# EAGLE board NanoDemultiplexerAndSDcardNew2 (EAGLE 9.6.2)
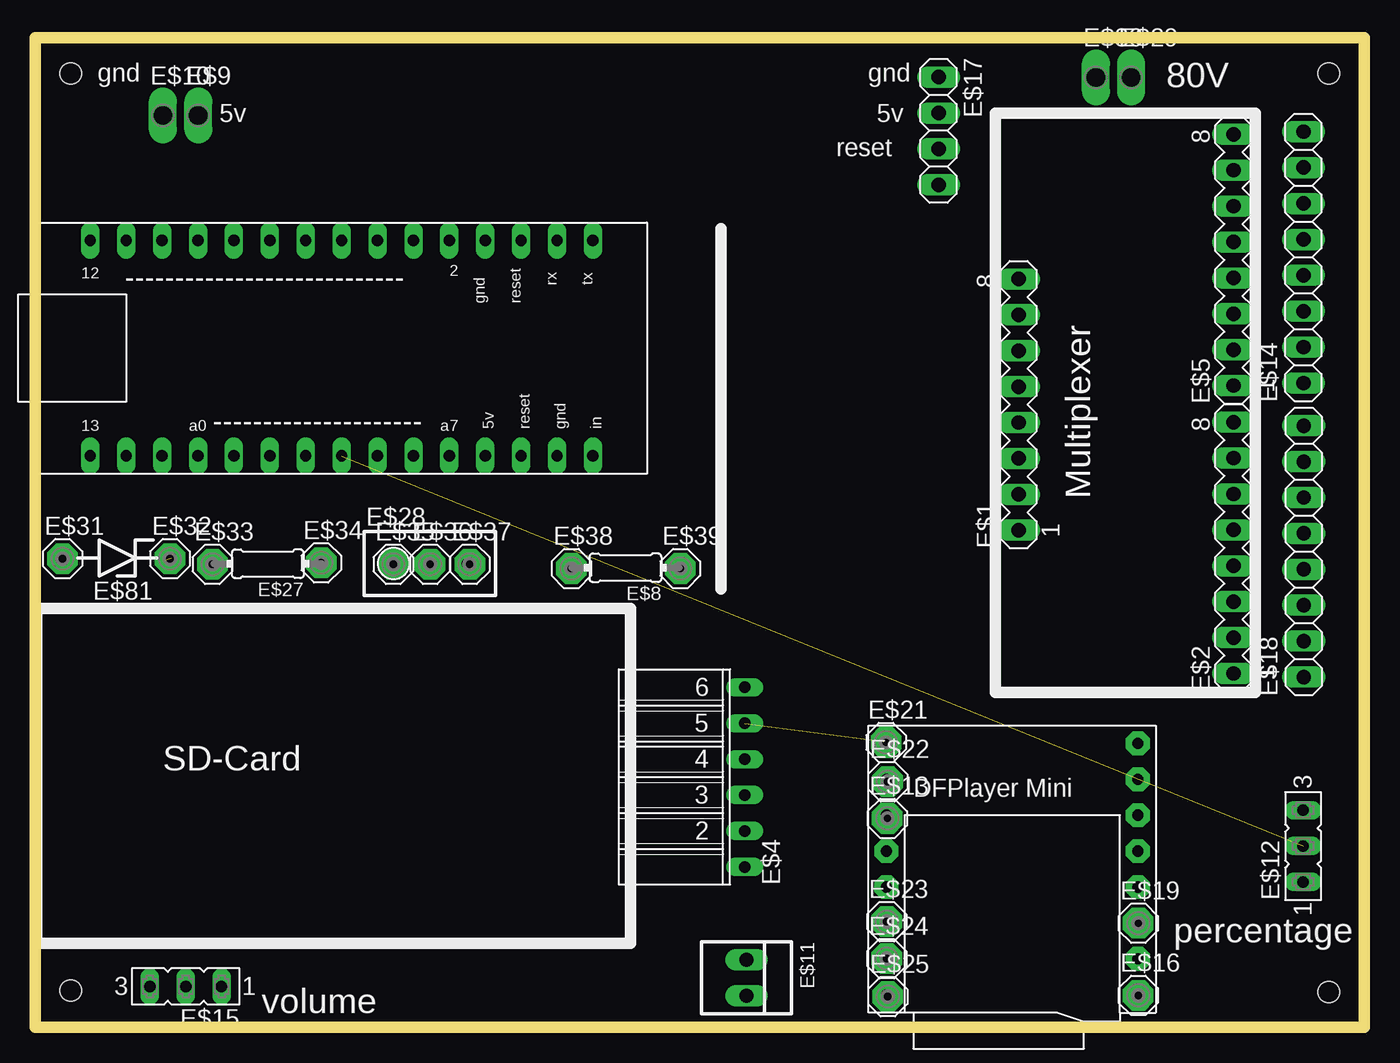
[diagram p0: board, top side]
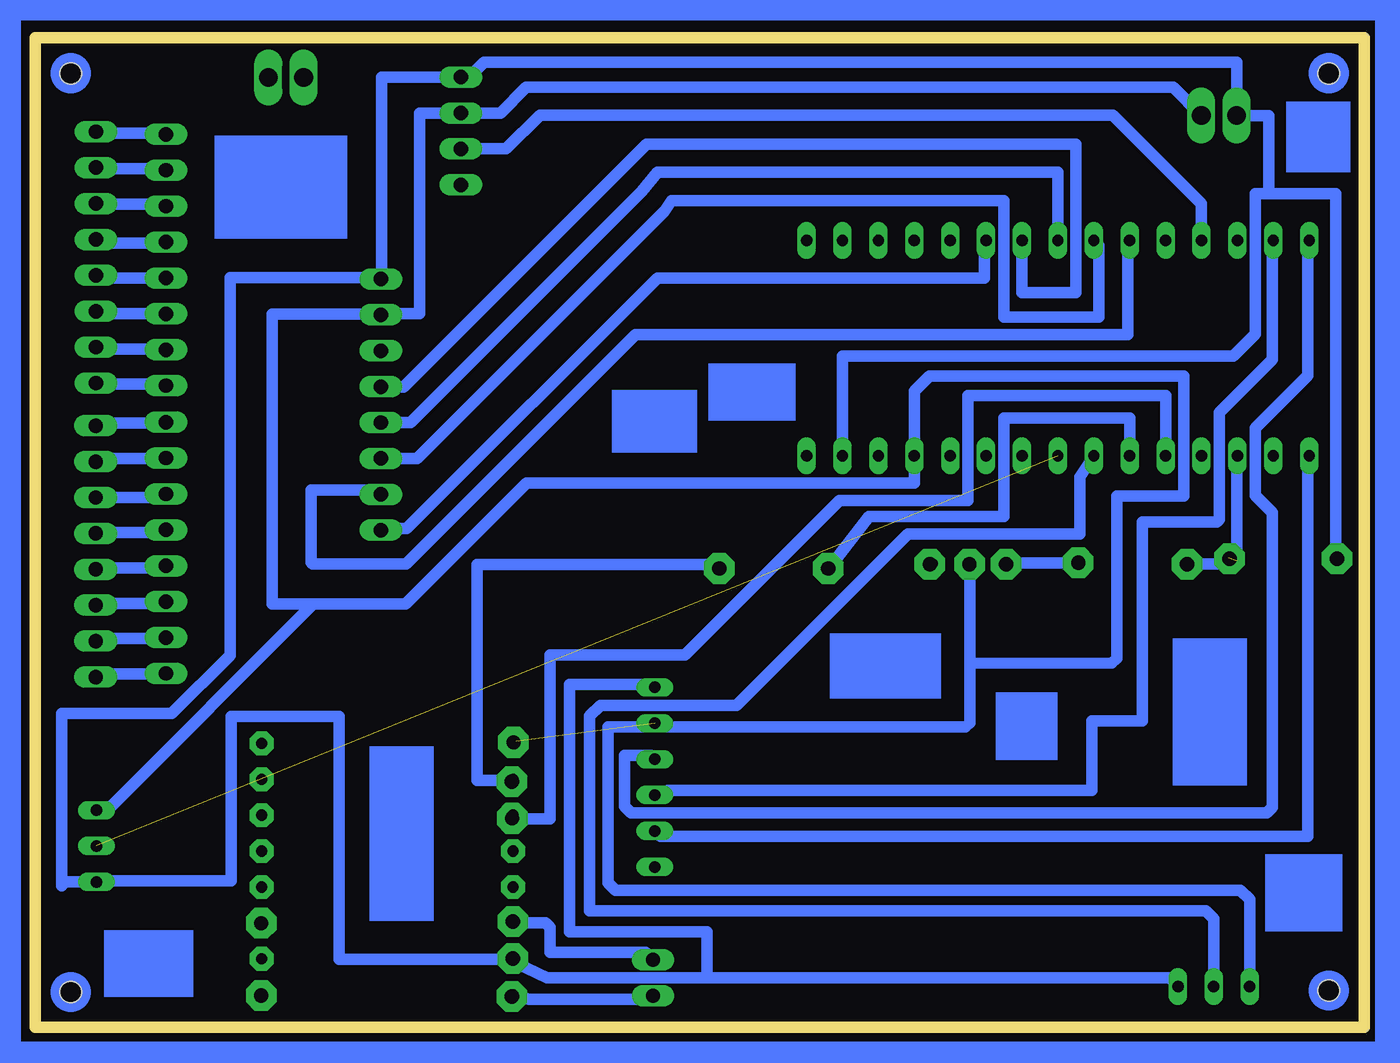
[diagram p1: board, bottom side, seen from below]

Size 94 x 70 mm. Coordinates in mm from the lower left corner, seen from the top.
Outline: 0,0 0,70 94,70 94,0 0,0
Copper layers (1*16): Top 0.035mm / dielectric 1.5mm / Bottom 0.035mm
Design rules "for_pcb_garage_middle *": minimum track width 0.6mm, minimum drill 0.35mm, track to track 0.2mm, track to pad 0.2mm, pad to pad 0.2mm, via to via 6mil, smd to smd 6mil, copper to edge 40mil, drill to drill 6mil, minimum pad ring 10mil, minimum via ring 8mil, stop-mask expansion 4mil, vias tented up to drill 0mil, thermal gap 10mil
Net classes: 0 default: clearance 0.205 mm
Holes 1.5 mm at 91.5,2.5 91.5,67.5 2.5,67.5 2.5,2.6

## Footprints (pad centres in the part's own frame; a part is rotated, then mirrored left to right if it is on the bottom)
MA08-1 = drill 1.016 long: 1 -8.89,0; 2 -6.35,0; 3 -3.81,0; 4 -1.27,0; 5 1.27,0; 6 3.81,0; 7 6.35,0; 8 8.89,0
FE06W = drill 0.813 long: 1 -6.35,0; 2 -3.81,0; 3 -1.27,0; 4 1.27,0; 5 3.81,0; 6 6.35,0
DFPLAYER = drill 0.8 pad 1.676 octagon: ADKEY1 8.89,-1.27; ADKEY2 8.89,1.27; BUSY 8.89,8.89; DAC_L -8.89,-1.27; DAC_R -8.89,1.27; GND_1 -8.89,-6.35; GND_2 8.89,-6.35; IO1 8.89,-8.89; IO2 8.89,-3.81; RX -8.89,6.35; SPK1 -8.89,-3.81; SPK2 -8.89,-8.89; TX -8.89,3.81; USB+ 8.89,3.81; USB- 8.89,6.35; VCC -8.89,8.89
ARDUINO-NANO = drill 0.8 long: P$2 -17.78,7.62; P$4 -15.24,7.62; P$5 -12.7,7.62; P$8 -10.16,7.62; P$9 -7.62,7.62; P$12 -5.08,7.62; P$13 -2.54,7.62; P$16 0,7.62; P$17 2.54,7.62; P$20 5.08,7.62; P$21 7.62,7.62; P$24 10.16,7.62; P$25 12.7,7.62; P$28 15.24,7.62; P$29 17.78,7.62; P$31 -17.78,-7.62; P$34 -15.24,-7.62; P$35 -12.7,-7.62; P$38 -10.16,-7.62; P$39 -7.62,-7.62; P$42 -5.08,-7.62; P$43 -2.54,-7.62; P$46 0,-7.62; P$47 2.54,-7.62; P$50 5.08,-7.62; P$51 7.62,-7.62; P$54 10.16,-7.62; P$55 12.7,-7.62; P$58 15.24,-7.62; P$59 17.78,-7.62
0204/7 = drill 0.813 octagon: 1 -3.81,0; 2 3.81,0
P1-13Y = drill 1.321 pad 1.905 long: TP 0,0
22-23-2021 = drill 1 long: 1 -1.27,0; 2 1.27,0
FE03-1 = drill 0.813 long: 1 -5.08,0; 2 -2.54,0; 5 0,0
MCS10B = drill 1.016 pad 2.159 octagon: MP 0,0
1X08 = drill 1.016 long: 1 -8.89,0; 2 -6.35,0; 3 -3.81,0; 4 -1.27,0; 5 1.27,0; 6 3.81,0; 7 6.35,0; 8 8.89,0
1X04 = drill 1.016 long: 1 -3.81,0; 2 -1.27,0; 3 1.27,0; 4 3.81,0
RTRIM3296W = drill 0.61: 1 0,-2.54; 2 0,0; 3 0,2.54
ZDIO-7.5 = drill 0.813 octagon: A 3.81,0; C -3.81,0

## Placement (x,y rotation side)
E$1  [MA08-1]  69.56,44.06 90 top
E$2  [MA08-1]  84.76,33.93 90 top
E$4  [FE06W]  50.17,17.71 90 top
E$5  [MA08-1]  84.76,54.29 90 top
E$6  [DFPLAYER]  69.1,11.2 0 top
E$7  [ARDUINO-NANO]  21.66,48.06 0 top
E$8  2.2K  [0204/7]  41.74,32.51 180 top
E$9  [P1-13Y]  11.52,64.51 0 top
E$10  [P1-13Y]  9.02,64.51 0 top
E$11  [22-23-2021]  50.3,3.5 270 top
E$12  [FE03-1]  89.68,15.37 90 top
E$13  [MCS10B]  60.27,14.79 0 top
E$14  [1X08]  89.71,54.48 90 top
E$15  [FE03-1]  8.1,2.9 180 top
E$16  [MCS10B]  78.02,2.26 0 top
E$17  [1X04]  63.89,63.42 270 top
E$18  [1X08]  89.73,33.68 90 top
E$19  [MCS10B]  78.02,7.36 0 top
E$21  [MCS10B]  60.17,20.16 0 top
E$22  [MCS10B]  60.3,17.38 0 top
E$23  [MCS10B]  60.24,7.48 0 top
E$24  [MCS10B]  60.23,4.86 0 top
E$25  [MCS10B]  60.31,2.18 0 top
E$27  50  [0204/7]  16.44,32.8 180 top
E$28  501  [RTRIM3296W]  27.9,32.82 270 top
E$29  [P1-13Y]  77.52,67.21 0 top
E$30  [P1-13Y]  75.02,67.21 0 top
E$31  [MCS10B]  1.92,33.16 0 top
E$32  [MCS10B]  9.52,33.16 0 top
E$33  [MCS10B]  12.52,32.76 0 top
E$34  [MCS10B]  20.22,32.86 0 top
E$35  [MCS10B]  25.32,32.76 0 top
E$36  [MCS10B]  27.92,32.76 0 top
E$37  [MCS10B]  30.72,32.76 0 top
E$38  [MCS10B]  37.92,32.46 0 top
E$39  [MCS10B]  45.62,32.46 0 top
E$81  zener 4.3v  [ZDIO-7.5]  5.8,33.2 180 top

## Library data of the parts
E$1 E$2 E$5 = con-lstb
E$4 = con-lsta
E$6 = DFPlayer_v1
E$7 = LSGPackages
E$8 E$27 = resistor
E$9 E$10 E$29 E$30 = testpad
E$11 = con-molex
E$12 E$15 = con-lsta2
E$13 E$16 E$19 E$21-E$25 E$31-E$39 = solpad
E$14 E$17 E$18 = pinhead
E$28 = rcl
E$81 = ref-packages-longpad

## Nets
5V: E$1.7 E$4.5 E$6.VCC E$7.P$54 E$9.TP E$12.5 E$15.5 E$17.2 E$28.2
5V1: E$29.TP
GND: E$1.8 E$4.6 E$6.GND_1 E$7.P$58 E$10.TP E$12.1 E$15.1 E$17.1 E$81.A
GND1: E$30.TP
MISO: E$4.4 E$7.P$2
MOSI: E$4.3 E$7.P$4
RESET: E$7.P$8 E$17.3
RX: E$6.RX E$8.1
S0: E$1.5 E$7.P$17
S1: E$1.4 E$7.P$16
S2: E$1.3 E$7.P$13
S3: E$1.2 E$7.P$12
S$2: E$7.P$35 E$27.2 E$81.C
S$3: E$27.1 E$28.1
S$4: E$7.P$46 E$12.2
S$9: E$7.P$9
S$10: E$7.P$42 E$8.2
S$15: E$5.8 E$14.8
S$16: E$5.7 E$14.7
S$17: E$5.6 E$14.6
S$18: E$5.5 E$14.5
S$19: E$5.4 E$14.4
S$20: E$5.3 E$14.3
S$21: E$5.2 E$14.2
S$22: E$5.1 E$14.1
S$23: E$2.8 E$18.8
S$24: E$2.7 E$18.7
S$25: E$2.6 E$18.6
S$26: E$2.5 E$18.5
S$31: E$2.4 E$18.4
S$32: E$2.3 E$18.3
S$33: E$2.2 E$18.2
S$34: E$2.1 E$18.1
SCK: E$4.2 E$7.P$31
SIGN: E$1.1 E$7.P$20
SPK1: E$6.SPK1 E$11.1
SPK2: E$6.SPK2 E$11.2
TX: E$6.TX E$7.P$39
VOLUME-CONTROL: E$7.P$43 E$15.2

## Tracks (layer width: path | path; a pad name or v marks a point on that pad's centre or on a via)
5V  (1 unrouted)
  Bottom 0.813: E$15.5 8.1,9.05 8.75,9.7 52.95,9.7 53.49,10.24 53.49,21.25 50.25,21.25 E$4.5 49.91,21.25 28.2,21.25 27.9,21.55 E$28.2 27.9,25.74 17.83,25.77 17.51,26.1 17.51,37.6 12.77,37.6 12.77,46.09 30.76,46.09 31.82,45.03 E$7.P$54 31.82,38.5 59.25,38.5 67.81,29.94 74.35,29.94 | 60,20.25 E$6.VCC | 74.35,29.94 88.92,15.37 E$12.5 | 74.35,29.94 77.25,29.94 77.25,50.47 69.62,50.47 E$1.7 69.5,50.5 66.81,50.5 66.81,64.69 E$17.2 61.1,64.69 59.29,66.5 13.51,66.5 E$9.TP
GND
  Bottom 0.813: 46.5,3.5 57.8,3.5 59.94,4.52 E$6.GND_1 60.25,4.81 72.5,4.81 72.5,22 80.14,22 80.14,10.38 89.59,10.38 E$12.1 91.88,10.29 92.15,10.02 92.15,22.2 84.34,22.2 80.22,26.32 80.22,53.03 69.64,53.03 E$1.8 69.51,53 69.51,67.23 E$17.1 63.33,67.23 62.26,68.3 9,68.3 9,64.53 E$10.TP 9,64.5 6.75,64.5 6.75,59 | 46.5,3.5 13.75,3.5 13.25,3 E$15.1 | E$4.6 50.37,24.25 56.2,24.25 56.2,6.75 46.5,6.75 46.5,3.5 | E$7.P$58 36.9,47.5 9.25,47.5 7.7,49.05 7.7,59 6.75,59 | 6.75,59 2,59 2,33.25 E$81.A
MISO
  Bottom 0.813: E$4.4 50.45,19.25 52.34,19.25 52.34,15.65 51.86,15.17 7.69,15.17 6.87,15.18 6.51,15.55 6.51,36.44 7.69,37.62 7.69,42.42 4,46.11 4,55.5 E$7.P$2
MOSI
  Bottom 0.813: E$7.P$4 6.5,55.5 6.5,47.25 10.24,43.51 10.24,35.93 10.42,35.74 15.69,35.74 15.69,21.69 19.27,21.69 19.27,16.77 49.26,16.77 E$4.3
RESET
  Bottom 0.813: E$7.P$8 11.5,58.27 17.78,64.54 58.31,64.54 60.69,62.15 E$17.3
RX
  Bottom 0.813: E$8.1 45.79,32.75 62.75,32.75 62.75,17.47 60.29,17.47 E$6.RX
S0
  Bottom 0.813: E$7.P$17 24.2,52 20.39,52 20.39,62.5 50.75,62.5 67.94,45.31 69.54,45.31 E$1.5
S1
  Bottom 0.813: E$7.P$16 21.66,60.5 50,60.5 51.12,59.12 67.46,42.79 E$1.4
S2
  Bottom 0.813: E$7.P$13 18.75,55.3 18.75,50.25 25.48,50.25 25.48,58.5 49,58.5 49.5,57.75 66.99,40.26 E$1.3
S3
  Bottom 0.813: E$7.P$12 16.73,55.68 16.73,49.02 51.54,49.02 67.77,32.8 74.39,32.8 74.5,32.91 74.5,38 69.85,38 E$1.2
S$2  (1 unrouted)
  Bottom 0.813: E$81.C 10.01,32.8 E$27.2 | E$7.P$35 9,40.4 9,33
S$3
  Bottom 0.813: E$27.1 20.3,32.85 25.34,32.85 E$28.1
S$4  (1 unrouted)
S$10
  Bottom 0.813: E$7.P$42 16.58,43.1 25.48,43.1 25.48,36.15 35.02,36.15 37.43,33.01 E$8.2
S$15
  Bottom 0.813: E$5.8 85,63.25 89.5,63.25 E$14.8
S$16
  Bottom 0.813: E$5.7 85,60.75 89.5,60.75 E$14.7
S$17
  Bottom 0.813: E$5.6 85,58.25 89.5,58.25 E$14.6
S$18
  Bottom 0.813: E$5.5 85,55.5 89.5,55.5 E$14.5
S$19
  Bottom 0.813: E$5.4 85,53 89.5,53 E$14.4
S$20
  Bottom 0.813: E$5.3 85,50.5 89.5,50.5 E$14.3
S$21
  Bottom 0.813: E$5.2 85,48 89.5,48 E$14.2
S$22
  Bottom 0.813: E$5.1 85,45.5 89.5,45.5 E$14.1
S$23
  Bottom 0.813: E$2.8 85,42.75 89.5,42.75 E$18.8
S$24
  Bottom 0.813: E$2.7 85,40.25 89.5,40.25 E$18.7
S$25
  Bottom 0.813: E$2.6 85,37.5 89.5,37.5 E$18.6
S$26
  Bottom 0.813: E$2.5 85,35 89.5,35 E$18.5
S$31
  Bottom 0.813: E$2.4 85,32.5 89.5,32.5 E$18.4
S$32
  Bottom 0.813: E$2.3 85,30 89.5,30 E$18.3
S$33
  Bottom 0.813: E$2.2 85,27.5 89.5,27.5 E$18.2
S$34
  Bottom 0.813: E$2.1 85,25 89.5,25 E$18.1
SCK
  Bottom 0.813: E$4.2 49.77,13.5 4,13.5 4,40.25 E$7.P$31
SIGN
  Bottom 0.813: E$7.P$20 26.88,55.55 26.88,53 50,53 67.73,35.28 69.45,35.28 E$1.1
SPK1
  Bottom 0.813: E$11.1 50.83,5.29 57.59,5.29 57.59,7.07 57.91,7.39 E$6.SPK1
SPK2
  Bottom 0.813: E$11.2 50.55,1.98 59.06,1.98 E$6.SPK2
TX
  Bottom 0.813: E$7.P$39 14.04,44.7 28.02,44.7 28.02,37.29 37.11,37.29 48.05,26.35 57.6,26.35 57.6,14.75 59.95,14.75 E$6.TX
VOLUME-CONTROL
  Bottom 0.813: E$15.2 10.64,7.69 11.2,8.25 54.79,8.25 54.79,22.02 54.02,22.79 44.41,22.79 32.28,34.92 20.12,34.92 20.12,38.95 19.12,40.42 E$7.P$43
(copper drawn outside any net)
  shapes: Bottom area x16, Bottom circle x4

## Text on the board
tPlace: gnd | gnd | 80V | 5v | 5v | reset | Multiplexer | SD-Card | percentage | volume
bTest: gnd | vcc | vcc | gnd | vcc | gnd | Demultiplexer | SD card | Tx | Vcc battery | Gnd battery